# Altium PCB canable.PcbDoc
Units mm, origin at the board's own origin, x right, y up, seen from the top; angles counter-clockwise.
Board outline 15.24 x 37.94 mm, 2 copper layers (Top, Bottom), stack 1.57 mm thick; 23 components, 19 nets, 112 pads, 21 vias.
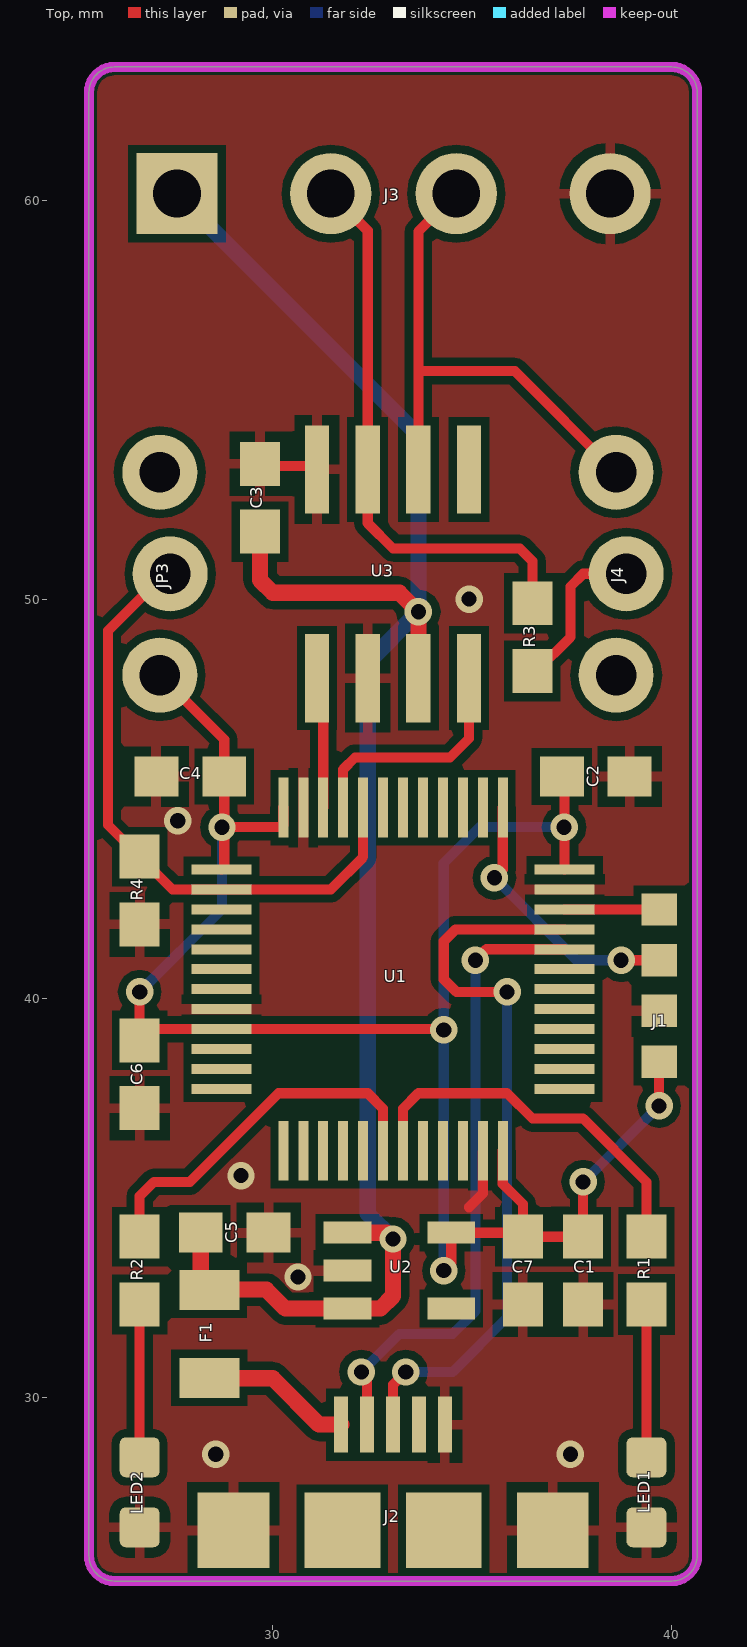
[diagram p0: Top view]
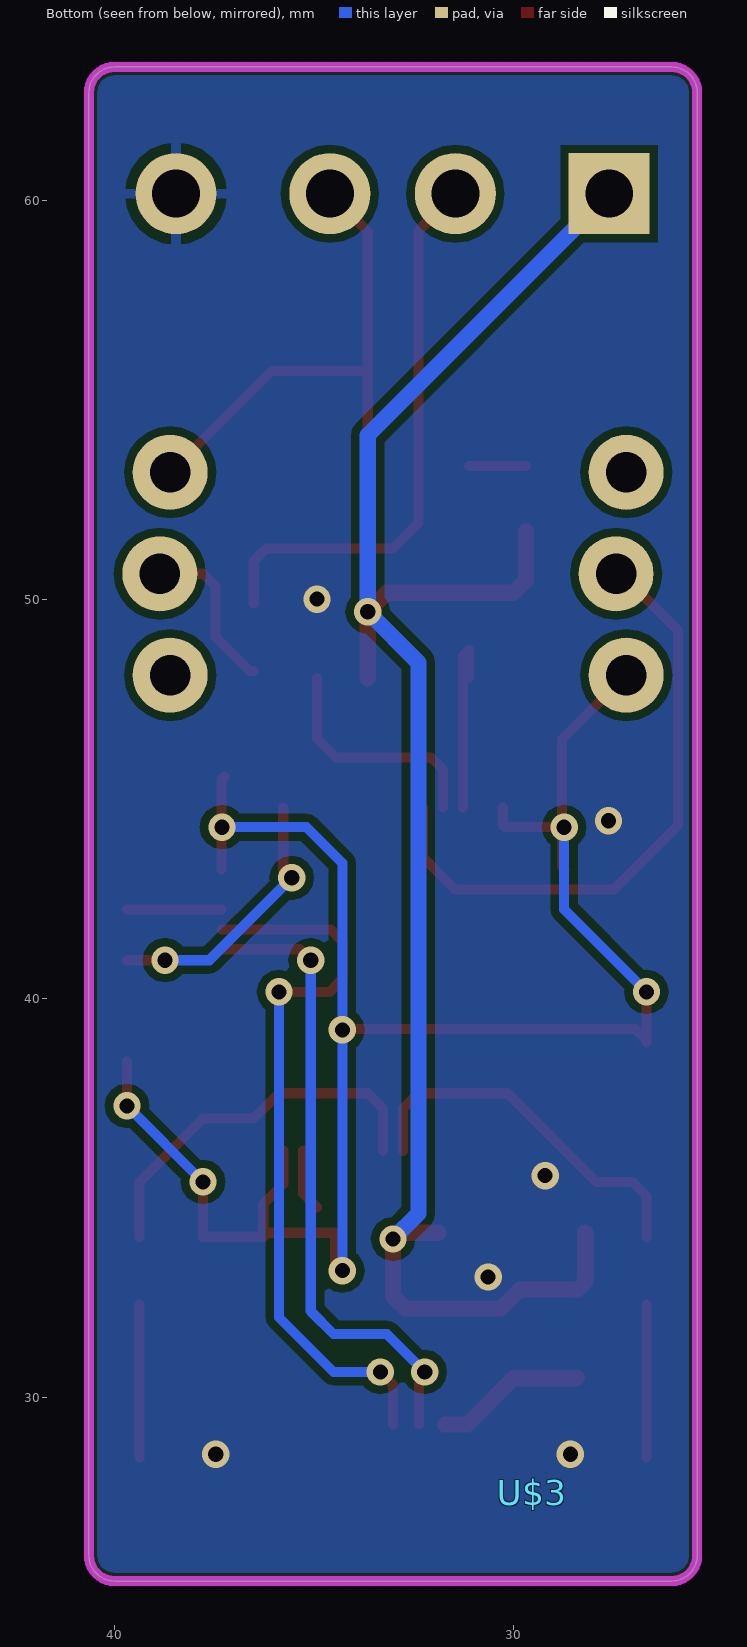
[diagram p1: Bottom view, seen from below]

## Layer stack, top to bottom
Top Solder: solder mask 0.0102, Solder Resist, Dk 3.5
Top: signal copper 0.035
Dielectric 1: core 1.5, FR-4, Dk 4.8
Bottom: signal copper 0.035
Bottom Solder: solder mask 0.0102, Solder Resist, Dk 3.5

## Board outline
25.4,62.706 25.4,26.035 ccw(c26.035,26.035) 26.035,25.4 40.005,25.4 ccw(c40.005,26.035) 40.64,26.035 40.64,62.706 ccw(c40.005,62.706) 40.005,63.341 26.035,63.341 ccw(c26.035,62.706)

## Design rules (kind name [scope] priority, off if disabled: settings)
Clearance [All] p1: gap=0.203 ignorepadtopadclearanceinfootprint=FALSE
Clearance "Clearance (Same Net)" [All] p2: gap=0 ignorepadtopadclearanceinfootprint=FALSE
HoleSize HoleSize_1 [All] p1: absolutevalues=TRUE maxlimit=2540 minlimit=0.305 maxpercent=80.000 minpercent=20.000
HoleSize [All] p2: absolutevalues=TRUE maxlimit=2.54 minlimit=0.025 maxpercent=80.000 minpercent=20.000
HoleToHoleClearance mdViaViaSameLayer [All] p1: gap=0.203 allowstackedmicrovias=TRUE
HoleToHoleClearance [All] p2: gap=0.254 allowstackedmicrovias=TRUE
PasteMaskExpansion mlMinCreamFrame [All] p1: expansion=0
PasteMaskExpansion [All] p2: expansion=0
PolygonConnect ThermalVias [IsVia] p1: connectstyle=Direct reliefconductorwidth=0.254 reliefentries=4 polygonreliefangle="90 Angle" airgapwidth=0.254
PolygonConnect [All] p2: connectstyle=Relief reliefconductorwidth=0.254 reliefentries=4 polygonreliefangle="90 Angle" airgapwidth=0.254
RoutingVias [All] p1: holewidth=0.711 width=1.27 viastyle="Through Hole" minholewidth=0.711 minwidth=1.27 maxholewidth=0.711 maxwidth=1.27
SilkToSilkClearance [All] p1 off: silktosilkclearance=0.254
SilkToSolderMaskClearance [IsPad] p1 off: minsilkscreentomaskgap=0.254 clearancetoexposedcopper=TRUE
SolderMaskExpansion mlMinStopFrame [All] p1: expansion=0.051
SolderMaskExpansion [All] p2: expansion=0.102
Width Width_1 [All] p1: maxlimit=2540 minlimit=0.152 preferedwidth=0.254
Width [All] p2: maxlimit=0.254 minlimit=0.254 preferedwidth=0.254
25 further rules are at their usual default settings.

## Components (designator, comment, footprint, x,y, rotation, side; value= is the part's Value field where it differs from the comment)
C1 "0.1uF" 0603-CAP 37.782,33.179 r270 top
C2 "0.1uF" 0603-CAP 38.1,45.561 r0 top
C3 "0.1uF" 0603-CAP 29.686,52.546 r90 top
C4 "0.1uF" 0603-CAP 27.94,45.561 r180 top
C5 "4.7uF" 0603-CAP 29.051,34.131 r180 top
C6 "0.1uF" 0603-CAP 26.67,38.1 r270 top
C7 "4.7uF" 0603-CAP 36.275,33.179 r270 top
F1 "" PTC0805 28.416,31.591 r270 top
J1 "" POGOPROG-CONN-4-ALLSMT 39.688,39.688 r180 top
J2 "USB-MICROB" USB-MICROB 33.02,26.67 r0 top
J3 "" SCREWTERMINAL-3.5MM-4_LOCK 27.781,60.166 r0 top
J4 "" 1X03_LOCK 38.735,48.101 r90 top
JP3 "" 1X03_LOCK 27.305,48.101 r90 top
LED1 "BLUE" LED-0603 39.37,27.622 r180 top
LED2 "GREEN" LED-0603 26.67,27.622 r180 top
R1 "240" 0603-RES 39.37,33.179 r270 top
R2 "240" 0603-RES 26.67,33.179 r270 top
R3 "120" 0603-RES 36.512,49.054 r270 top
R4 "10k" 0603-RES 26.67,42.704 r90 top
U1 "STM32f042x6" LQFP48 33.02,40.481 r0 top (schematic designator U$1)
U2 "AP2202K" SOT23-5 33.179,33.179 r270 top
U3 "MCP2551" SO08 33.02,50.641 r0 top
U$3 "" CANABLE-0.2 29.527,27.622 r90 bottom

## Footprints (in the part's own frame and the unit in brackets; to place one, negate y for a bottom-side part, rotate by r counter-clockwise, add the part's x,y. Pads: shape width x height; smd on the part's side, far side on the other; paste and mask are expansions set on the pad)
1X03_LOCK [mil] "1X03_LOCK"
  round 74 hole 40: 1(0,5) 2(100,-5) 3(200,5)
0603-CAP [mm] "0603-CAP"
  rect 1.1x1 smd: 1(-0.85,0) 2(0.85,0)
0603-RES [mm] "0603-RES"
  rect 1.1x1 smd: 1(-0.85,0) 2(0.85,0)
CANABLE-0.2 [mm] "CANABLE-0.2"
LED-0603 [mm] "LED-0603"
  rrect30% 1x1 smd: A(0,-0.877) C(0,0.877)
LQFP48 [mm] "LQFP48"
  rect 1.5x0.25 smd: 1(-4.3,2.75) 2(-4.3,2.25) 3(-4.3,1.75) 4(-4.3,1.25) 5(-4.3,0.75) 6(-4.3,0.25) 7(-4.3,-0.25) 8(-4.3,-0.75) 9(-4.3,-1.25) 10(-4.3,-1.75) 11(-4.3,-2.25) 12(-4.3,-2.75) 25(4.3,-2.75) 26(4.3,-2.25) 27(4.3,-1.75) 28(4.3,-1.25) 29(4.3,-0.75) 30(4.3,-0.25) 31(4.3,0.25) 32(4.3,0.75) 33(4.3,1.25) 34(4.3,1.75) 35(4.3,2.25) 36(4.3,2.75)
  rect 0.25x1.5 smd: 13(-2.75,-4.3) 14(-2.25,-4.3) 15(-1.75,-4.3) 16(-1.25,-4.3) 17(-0.75,-4.3) 18(-0.25,-4.3) 19(0.25,-4.3) 20(0.75,-4.3) 21(1.25,-4.3) 22(1.75,-4.3) 23(2.25,-4.3) 24(2.75,-4.3) 37(2.75,4.3) 38(2.25,4.3) 39(1.75,4.3) 40(1.25,4.3) 41(0.75,4.3) 42(0.25,4.3) 43(-0.25,4.3) 44(-0.75,4.3) 45(-1.25,4.3) 46(-1.75,4.3) 47(-2.25,4.3) 48(-2.75,4.3)
POGOPROG-CONN-4-ALLSMT [mil] "POGOPROG-CONN-4-ALLSMT"
  rect 35x32 smd: 1(0,50) 2(0,0) 3(0,-50) 4(0,-100)
PTC0805 [mm] "PTC0805"
  rect 1x1.5 smd: 1(-1.1,0) 2(1.1,0)
SCREWTERMINAL-3.5MM-4_LOCK [mil] "SCREWTERMINAL-3.5MM-4_LOCK"
  rect 80x80 hole 47.24: 1(-7,0)
  round 80 hole 47.24: 2(144.8,0) 3(268.59,0) 4(420.39,0)
SO08 [mil] "SO08"
  rect 24x87 smd: 1(-75,-103) 2(-25,-103) 3(25,-103) 4(75,-103) 5(75,103) 6(25,103) 7(-25,103) 8(-75,103)
SOT23-5 [mm] "SOT23-5"
  rect 0.55x1.2 smd: 1(-0.95,-1.3) 2(0,-1.3) 3(0.95,-1.3) 4(0.95,1.3) 5(-0.95,1.3)
USB-MICROB [mm] "USB-MICROB"
  rect 0.35x1.4 smd: D+(0,2.65) D-(-0.65,2.65) GND(1.3,2.65) ID(0.65,2.65) VBUS(-1.3,2.65)
  rect 1.8x1.9 smd: MT1(-4,0) MT2(4,0)
  rect 1.9x1.9 smd: P$1(-1.27,0) P$2(1.27,0)

## Part data
C1 C2 C3 C4 C5 C6 C7: library part 0603-CAP
F1: library part PTC0805
J1: library part POGOPROG-CONN-4-ALLSMT
J3: library part SCREWTERMINAL-3.5MM-4_LOCK
J4 JP3: library part 1X03_LOCK
LED1 LED2: library part LED-0603
R1 R2 R3 R4: library part 0603-RES
U1: library part LQFP48
U2: library part SOT23-5
U3: library part SO08
U$3: library part CANABLE-0.2

## Via types
v1: diameter 0.686/0.686 (per signal layer), hole 0.381, Top to Bottom, 21 vias

## Nets (pads, with @x,y where several pads share a name; then routed paths per layer and width w, separated by ;. In a path a pad name is that pad's centre, name@x,y a point inside that pad or via, vN(x,y) a via of type N, cw(c..) or ccw(c..) an arc to the next point about the centre after c; other vN are vias at no path point)
3.3V: C1.1 C2.1 C4.1 C6.1 C7.1 J1.1 JP3.1 U1.1 U1.9 U1.24 U1.36 U1.48 U2.5 | length 49.4
  Top w0.254: C6.1@26.67,38.894 C6.1 ; v1(26.67,40.164) C6.1 ; JP3.1 28.79,46.489 C4.1 v1@28.79,44.291 ; U1.1 28.79,43.301 v1@28.79,44.291 ; v1(28.734,44.291) v1@28.79,44.291 ; U1.48 30.27,44.343 30.219,44.291 v1@28.79,44.291 ; v1(34.29,33.179) 34.479,33.368 U2.5 36.174,34.129 C7.1 ; v1(34.29,39.211) 34.27,39.231 U1.9 26.951,39.231 C6.1 ; U1.24 35.77,35.35 36.275,34.846 C7.1 ; C2.1 37.32,45.491 v1@37.32,44.291 ; v1(37.306,44.291) v1@37.32,44.291 ; U1.36 v1@37.32,44.291 ; v1(37.782,35.401) C1.1 C7.1 ; v1(39.688,37.306) J1.1
  Bottom w0.254: v1(26.67,40.164) 28.734,42.227 v1(28.734,44.291) ; v1(34.29,33.179) v1(34.29,39.211) 34.29,43.393 35.188,44.291 v1(37.306,44.291) ; v1(37.782,35.401) v1(39.688,37.306)
BOOT0: JP3.2 R4.2 U1.2 U1.44 | length 15.7
  Top w0.254: JP3.2 27.305,50.641 25.876,49.212 25.876,44.347 R4.2 27.492,42.731 U1.2 31.46,42.731 32.27,43.541 U1.44
CAN_RX: U1.45 U3.4 | length 5.9
  Top w0.254: U1.45 31.77,45.74 32.067,46.038 34.449,46.038 34.925,46.514 U3.4
CAN_TX: U1.46 U3.1 | length 4.7
  Top w0.254: U3.1 31.115,48.736 31.27,48.581 U1.46
CANH: J3.2 R3.1 U3.7 | length 14.2
  Top w0.254: J3.2 32.385,59.24 U3.7 32.385,51.911 33.02,51.276 36.195,51.276 36.512,50.959 R3.1
CANL: J3.3 J4.3 U3.6 | length 13.3
  Top w0.254: U3.6 33.655,55.721 ; J3.3 33.655,59.218 33.655,55.721 ; J4.3 36.068,55.721 33.655,55.721
D+: J2.D+ U1.33 | length 18.5
  Top w0.254: J2.D+ 33.02,30.321 v1(33.337,30.639) ; v1(35.877,40.164) 34.608,40.164 34.29,40.481 34.29,41.434 34.587,41.731 U1.33
  Bottom w0.254: v1(33.337,30.639) 34.512,30.639 35.877,32.004 v1(35.877,40.164)
D-: J2.D- U1.32 | length 16
  Top w0.254: v1(32.226,30.639) 32.37,30.495 J2.D- ; v1(35.084,40.957) 35.358,41.231 U1.32
  Bottom w0.254: v1(32.226,30.639) 33.179,31.591 34.511,31.591 35.084,32.164 v1(35.084,40.957)
GND: C1.2 C2.2 C3.2 C4.2 C5.1 C6.2 C7.2 J1.2 J2.GND J2.MT1 J2.MT2 J3.4 LED1.C LED2.C R4.1 U1.8 U1.23 U1.35 U1.47 U2.2 U3.2 U3.8 | length 3
  Top w0.254: C3.2@29.686,53.34 U3.8@31.115,53.34 ; 34.925,34.766 35.27,35.111 U1.23
  other v1: 28.575,28.575 37.465,28.575 30.639,33.02 29.21,35.56 27.622,44.45 34.925,50.006
LED_RX: R1.1 U1.19 | length 9.6
  Top w0.254: U1.19 33.27,37.239 33.655,37.624 35.877,37.624 36.512,36.989 37.782,36.989 39.37,35.401 R1.1
LED_TX: R2.1 U1.18 | length 9.4
  Top w0.254: R2.1 26.67,35.046 27.025,35.401 27.925,35.401 30.148,37.624 32.385,37.624 32.77,37.239 U1.18
N$1: 
N$2: LED2.A R2.2 | length 3.8
  Top w0.254: LED2.A R2.2
N$3: J4.2 R3.2 | length 4.1
  Top w0.254: R3.2 36.615,48.204 37.465,49.054 37.465,50.324 37.782,50.641 J4.2
N$4: F1.2 J2.VBUS | length 3.8
  Top w0.406: F1.2 28.427,30.48 30.004,30.48 31.164,29.32 J2.VBUS
N$23: LED1.A R1.2 | length 3.8
  Top w0.254: LED1.A R1.2
SWCLK: J1.3 U1.37 | length 6.8
  Top w0.254: v1(35.56,43.021) 35.77,43.231 U1.37 ; v1(38.735,40.957) J1.3
  Bottom w0.254: v1(35.56,43.021) 37.624,40.957 v1(38.735,40.957)
SWDIO: J1.4 U1.34 | length 2.4
  Top w0.254: U1.34 39.684,42.231 J1.4
V_BATT: C3.1 C5.2 F1.1 J3.1 U2.1 U2.3 U3.3 | length 45.8
  Top w0.254: U2.3 31.881,32.226 U2.3@31.909,32.199
  Top w0.406: C5.2 28.201,32.906 F1.1 28.427,32.703 29.845,32.703 30.321,32.226 31.881,32.226 32.703,32.226 33.02,32.544 v1(33.02,33.972) 32.864,34.129 U2.1 ; C3.1 29.686,50.482 30.004,50.165 33.179,50.165 v1(33.655,49.689) U3.3
  Bottom w0.406: J3.1 33.655,54.115 v1(33.655,49.689) 32.385,48.419 32.385,34.608 v1(33.02,33.972)
pads on no net: J2.ID J2.P$1 J2.P$2 J4.1 JP3.3 U1.3 U1.4 U1.5 U1.6 U1.7 U1.10 U1.11 U1.12 U1.13 U1.14 U1.15 U1.16 U1.17 U1.20 U1.21 U1.22 U1.25 U1.26 U1.27 U1.28 U1.29 U1.30 U1.31 U1.38 U1.39 U1.40 U1.41 U1.42 U1.43 U2.4 U3.5

## Polygon pours and split planes (outlines as drawn)
GND on Bottom "Bottom-GND" (solid, remove dead copper, pour order 0): 23.368,67.913 45.212,67.913 45.212,23.209 23.368,23.209
GND on Top "Top-GND" (solid, remove dead copper, pour order 2): 25.4,25.4 40.64,25.4 40.64,63.627 25.4,63.627

## Keep-outs
Keep-Out Layer:
  the board outline again, w0.254

## Silkscreen, mask and mechanical layers (free items; w line width, h text height)
Dimension:
  the board outline again, w0
Top Assembly:
  circle w0.127: c27.464,26.035 r0.159
  circle w0.127: c38.576,26.035 r0.159
  text "5v" at 28.575,55.88 h1.26 r180
  text "CANH" at 32.544,55.88 h1.26 r180
  text "CANL" at 36.512,55.88 h1.26 r180
  text "GND" at 39.688,55.88 h1.26 r180
  text "TERM" at 36.989,50.8 h1.26 r90
  text "BOOT" at 29.051,50.641 h1.26 r270
  text "Pwr" at 25.717,29.21 h1.26
  text "Act" at 38.417,29.21 h1.26
Bottom Assembly:
  text "5v" at 26.987,58.737 h1.26 r180
  text "CANH" at 29.845,58.737 h1.26 r180
  text "CANL" at 33.496,58.737 h1.26 r180
  text "GND" at 37.465,58.737 h1.26 r180
  text "protofusion.org/canable" at 25.876,26.035 h1.26 r270

## Dimensions
25.4,63.976 to 40.64,63.976 on Mechanical 16
41.275,24.13 to 41.91,63.341 on Mechanical 16